# Altium PCB K3000-0176_B.PcbDoc
Units mm, origin at the board's own origin, x right, y up, seen from the top; angles counter-clockwise.
Board outline 168 x 20 mm, 2 copper layers (Top Layer, Bottom Layer), stack 1.671 mm thick; 43 components, 41 nets, 148 pads, 31 vias.
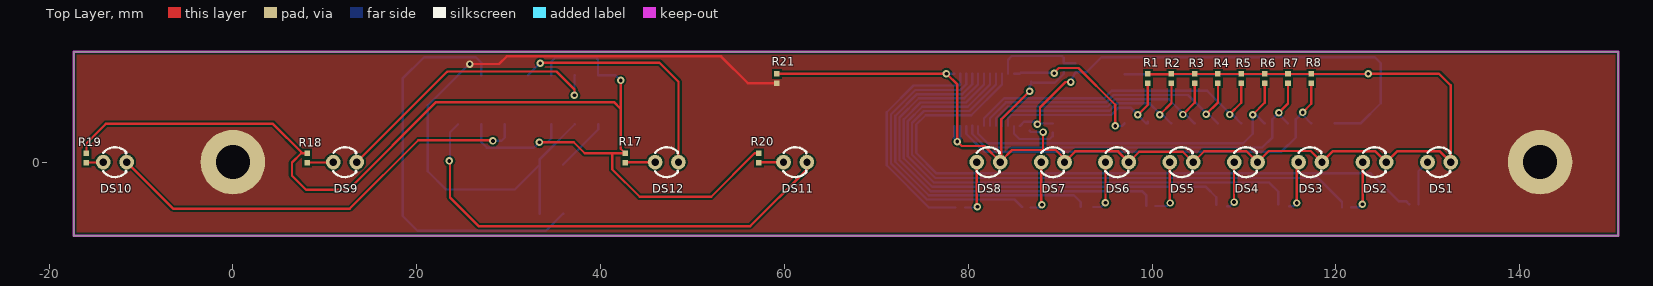
[diagram p0: Top Layer view]
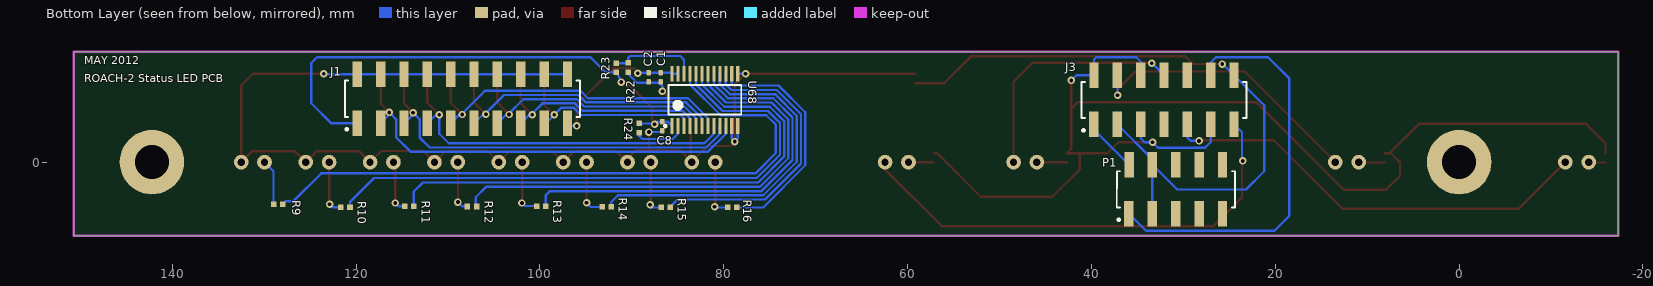
[diagram p1: Bottom Layer view, seen from below]
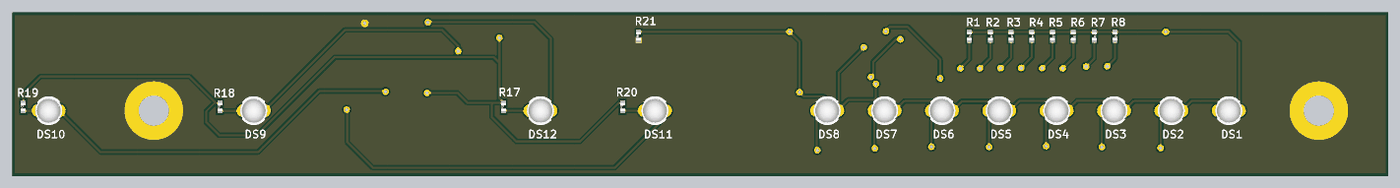
[diagram p2: 3D render of the assembled board from above, using the file's embedded part models]
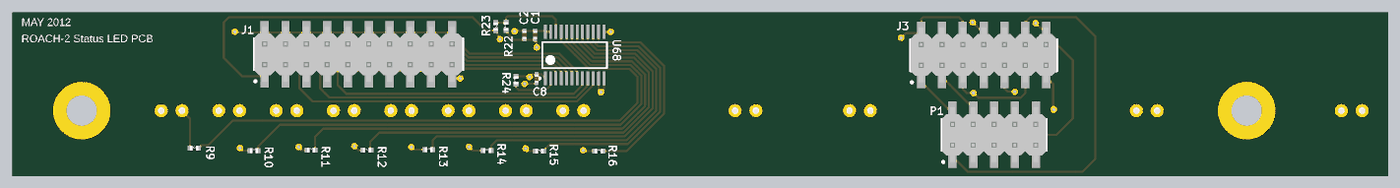
[diagram p3: 3D render of the assembled board from below, using the file's embedded part models]

## Layer stack, top to bottom
Top Layer: signal copper 0.0356
Dielectric: prepreg 1.6002, FR-4, Dk 4.8
Bottom Layer: signal copper 0.0356

## Board outline
-17.3,-8 -17.3,12 150.7,12 150.7,-8

## Design rules (kind name [scope] priority, off if disabled: settings)
Clearance Clearance_Pads [IsPad vs IsPad] p1: gap=0.203
Clearance Clearance_2 [InNamedPolygon('AGND_Z')] p2: gap=0.203
Clearance Clearance_1 [InNamedPolygon('AGND_X')] p3: gap=0.203
Clearance [InNamedPolygon('AGND_Y') Or  InNamedPolygon('AGND_X')] p4: gap=0.203
Clearance Clearance_General [All] p5: gap=0.203
ComponentClearance [All] p1: gap=0.2 collisioncheckmode=3 verticalgap=0.2 showdistances=FALSE
DiffPairsRouting [All] p1 off: maxlimit=0.254 minlimit=0.254 mostfreqgap=0.254 maxuncoupledlength=12.7
FabricationTestPointUsage TestPointUsage [All] p1 off: valid=0 allowmultiple=FALSE
FabricationTestpoint Testpoint [All] p1 off: side=3 testpointundercomponent=TRUE minsize=1.016 maxsize=2.54 preferedsize=1.524 minholesize=0 maxholesize=1.016 preferedholesize=0.813 testpointgrid=0.025 allowsidetop=TRUE allowsidebottom=TRUE usegrid=TRUE gridtolerance=0
FanoutControl Fanout_BGA [IsBGA] p1 off: bgadir=Out bgaviamode=Centered fanoutstyle=Auto fanoutdirection=Alternating viagrid=0.025 // Fanout_BGA (Default Rule)
FanoutControl Fanout_LCC [IsLCC] p2 off: bgadir=Out bgaviamode=Centered fanoutstyle=Auto fanoutdirection=Alternating viagrid=0.025 // Fanout_LCC (Default Rule)
FanoutControl Fanout_SOIC [IsSOIC] p3 off: bgadir=Out bgaviamode=Centered fanoutstyle=Auto fanoutdirection=Alternating viagrid=0.025 // Fanout_SOIC (Default Rule)
FanoutControl Fanout_Small [(CompPinCount < 5)] p4 off: bgadir=Out bgaviamode=Centered fanoutstyle=Auto fanoutdirection=OutThenIn viagrid=0.025 // Fanout_Small (Default Rule)
FanoutControl Fanout_Default [All] p5 off: bgadir=Out bgaviamode=Centered fanoutstyle=Auto fanoutdirection=Alternating viagrid=0.025 // Fanout_Default (Default Rule)
HoleSize [All] p1 off: absolutevalues=TRUE maxlimit=2.54 minlimit=0.406 maxpercent=80.000 minpercent=20.000
LayerPairs [All] p1 off: enforce=TRUE
MinimumAnnularRing [All] p1: minimumring=0.203
PlaneClearance [All] p1 off: clearance=0.3
PlaneConnect PlaneConnect_Pads [Ispad] p1 off: planeconnectstyle=Relief reliefexpansion=0.5 reliefentries=4 reliefconductorwidth=0.35 reliefairgap=0.25
PlaneConnect PlaneConnect_Vias [Isvia] p2 off: planeconnectstyle=Direct reliefexpansion=0.508 reliefentries=4 reliefconductorwidth=0.254 reliefairgap=0.254
PolygonConnect "Pwr via" [All] p1: connectstyle=Direct reliefconductorwidth=0.254 reliefentries=4 polygonreliefangle="90 Angle"
PolygonConnect [All] p2: connectstyle=Relief reliefconductorwidth=0.5 reliefentries=4 polygonreliefangle="90 Angle"
RoutingCorners [All] p1: cornerstyle=45-Degree minsetback=2.5 maxsetback=2.5
RoutingPriority [All] p1 off: routingpriority=0
RoutingTopology [All] p1 off: topology=Shortest
RoutingVias "Pwr Vias" [Isvia] p1: holewidth=0.406 width=0.813 viastyle="Through Hole" minholewidth=0.406 minwidth=0.813 maxholewidth=0.406 maxwidth=2.54
RoutingVias RoutingVias_General [All] p2: holewidth=0.406 width=0.813 viastyle="Through Hole" minholewidth=0.406 minwidth=0.813 maxholewidth=0.406 maxwidth=0.813
SilkscreenOverComponentPads [All] p1: minsilkscreentomaskgap=0.254
SolderMaskExpansion [All] p1: expansion=0.06
ViasUnderSMD [All] p1: allowed=FALSE
Width Width_Power [InNetClass('POWER')] p1: maxlimit=0.508 minlimit=0.508 preferedwidth=0.508 minimp=50.000000 maximp=50.000000 favimp=50.000000
Width Width_General [InNetClass('signal')] p2: maxlimit=0.254 minlimit=0.254 preferedwidth=0.254 minimp=50.000000 maximp=50.000000 favimp=50.000000
11 further rules are at their usual default settings.

## Components (designator, comment, footprint, x,y, rotation, side; value= is the part's Value field where it differs from the comment)
C1 "0.1uF" CAPC1005X60L 86.868,9.238 r90 bottom
C2 "0.1uF" CAPC1005X60L 88.163,9.238 r90 bottom
C8 "0.1uF" CAPC1005X60L 86.69,3.912 r90 bottom
DS1 "LS-3341" LED-3MM 131.225,0 r90 top locked
DS2 "LS-3341" LED-3MM 124.2,0 r90 top locked
DS3 "LS-3341" LED-3MM 117.2,0 r90 top locked
DS4 "LS-3341" LED-3MM 110.2,0 r90 top locked
DS5 "LS-3341" LED-3MM 103.2,0 r90 top locked
DS6 "LS-3341" LED-3MM 96.2,0 r90 top locked
DS7 "LS-3341" LED-3MM 89.2,0 r90 top locked
DS8 "LS-3341" LED-3MM 82.2,0 r90 top locked
DS9 "LS-3341" LED-3MM 12.2,0 r90 top locked
DS10 "LS-3341" LED-3MM -12.825,0 r90 top locked
DS11 "LS-3341" LED-3MM 61.175,0 r90 top locked
DS12 "LS-3341" LED-3MM 47.2,0 r90 top locked
J1 "1-1241050-0" "HEADER 10x2, SMT" 108.433,6.883 r180 bottom
J3 "1241050-7" "HEADER 7x2, SMT" 32.106,6.782 r180 bottom
P1 "SMT Header 5X2" "HEADER 5x2, SMT" 30.81,-2.972 r180 bottom
R1 "10K" RESC1005X40L 99.543,9.093 r270 top
R2 "10K" RESC1005X40L 102.108,9.093 r270 top
R3 "10K" RESC1005X40L 104.623,9.093 r270 top
R4 "10K" RESC1005X40L 107.163,9.093 r270 top
R5 "10K" RESC1005X40L 109.703,9.093 r270 top
R6 "10K" RESC1005X40L 112.243,9.093 r270 top
R7 "10K" RESC1005X40L 114.783,9.093 r270 top
R8 "10K" RESC1005X40L 117.323,9.093 r270 top
R9 "180R" RESC1005X40L 128.473,-4.597 r180 bottom
R10 "180R" RESC1005X40L 121.158,-4.902 r180 bottom
R11 "180R" RESC1005X40L 114.198,-4.801 r180 bottom
R12 "180R" RESC1005X40L 107.391,-4.826 r180 bottom
R13 "180R" RESC1005X40L 99.847,-4.775 r180 bottom
R14 "180R" RESC1005X40L 92.735,-4.877 r180 bottom
R15 "180R" RESC1005X40L 86.309,-4.928 r180 bottom
R16 "180R" RESC1005X40L 79.07,-4.928 r180 bottom
R17 "180R" RESC1005X40L 42.697,0.457 r90 top
R18 "180R" RESC1005X40L 8.077,0.457 r90 top
R19 "180R" RESC1005X40L -15.926,0.457 r90 top
R20 "180R" RESC1005X40L 57.226,0.457 r90 top
R21 "0R" RESC1005X40L 59.182,9.093 r90 top
R22 "0R" RESC1005X40L 90.399,10.287 r90 bottom
R23 "3K3" RESC1005X40L 91.669,10.262 r270 bottom
R24 "3K3" RESC1005X40L 89.179,3.708 r90 bottom
U68 "SN74AVC8T245" PW024 82.042,6.782 r90 bottom

## Footprints (in the part's own frame and the unit in brackets; to place one, negate y for a bottom-side part, rotate by r counter-clockwise, add the part's x,y. Pads: shape width x height; smd on the part's side, far side on the other; paste and mask are expansions set on the pad)
CAPC1005X60L [mm] "Chip Capacitor, Body 1.0x0.5mm, IPC High Density"
  rrect50% 0.6x0.5 smd: 1(-0.5,0) 2(0.5,0)
  body extent -0.5,-0.25 0.5,0.25, height 0.49
"HEADER 5x2, SMT" [mm] "SMT Header, 5 x 2 rows, 2.54mm pitch"
  rect 1.02x2.77 smd: 1(-5.114,-2.642) 2(-5.097,2.692) 3(-2.557,-2.642) 4(-2.557,2.692) 5(-0.017,-2.642) 6(-0.017,2.692) 7(2.523,-2.642) 8(2.523,2.692) 9(5.063,-2.642) 10(5.063,2.692)
  silkscreen extent -6.43,-3.43 6.43,1.98, body extent -6.38,-3.58 6.32,3.62, height 9.94
"HEADER 7x2, SMT" [mm] "SMT Header, 7 x 2 rows, 2.54mm pitch"
  rect 1.02x2.77 smd: 1(-7.638,-2.664) 2(-7.621,2.67) 3(-5.081,-2.664) 4(-5.081,2.67) 5(-2.541,-2.664) 6(-2.541,2.67) 7(-0.001,-2.664) 8(-0.001,2.67) 9(2.539,-2.664) 10(2.539,2.67) 11(5.079,-2.664) 12(5.079,2.67) 13(7.619,-2.664) 14(7.619,2.67)
  silkscreen extent -8.97,-3.45 8.99,1.96, body extent -8.89,-3.58 8.89,3.62, height 9.94
"HEADER 10x2, SMT" [mm] "SMT Header, 10 x 2 rows, 2.54mm pitch"
  rect 1.02x2.77 smd: 1(-11.43,-2.667) 2(-11.447,2.667) 3(-8.89,-2.667) 4(-8.89,2.667) 5(-6.35,-2.667) 6(-6.35,2.667) 7(-3.81,-2.667) 8(-3.81,2.667) 9(-1.27,-2.667) 10(-1.27,2.667) 11(1.27,-2.667) 12(1.27,2.667) 13(3.81,-2.667) 14(3.81,2.667) 15(6.35,-2.667) 16(6.35,2.667) 17(8.89,-2.667) 18(8.89,2.667) 19(11.43,-2.667) 20(11.43,2.667)
  silkscreen extent -12.78,-3.43 12.8,1.98, body extent -12.7,-3.61 12.7,3.59, height 9.94
LED-3MM [mil] "Vertical Mount, 3mm LED"
  round 63 hole 31: 1(0,-50)
  round 63 hole 31.5: 2(0,50)
  silkscreen extent -64,-48 64,51, body extent -65,-65 64,65, height 217
PW024 [mm] "Plastic Small Outline Package, 24Pin"
  rect 1.7x0.35 smd: 1(-2.85,3.575) 2(-2.85,2.925) 3(-2.85,2.275) 4(-2.85,1.625) 5(-2.85,0.975) 6(-2.85,0.325) 7(-2.85,-0.325) 8(-2.85,-0.975) 9(-2.85,-1.625) 10(-2.85,-2.275) 11(-2.85,-2.925) 12(-2.85,-3.575) 13(2.85,-3.575) 14(2.85,-2.925) 15(2.85,-2.275) 16(2.85,-1.625) 17(2.85,-0.975) 18(2.85,-0.325) 19(2.85,0.325) 20(2.85,0.975) 21(2.85,1.625) 22(2.85,2.275) 23(2.85,2.925) 24(2.85,3.575)
  silkscreen extent -2.97,-3.95 1.6,4.43, body extent -2.25,-3.95 2.25,3.95, height 1.2
RESC1005X40L [mm] "Chip Resistor, Body 1.1x0.5mm, IPC High Density"
  rect 0.6x0.6 smd: 1(-0.5,0) 2(0.5,0)
  body extent -0.5,-0.3 0.5,0.3, height 0.2

## Part data
C1 C2 C8: library part CAP-CER-1, "0.1uF, Ceramic Capacitor"
DS1 DS2 DS3 DS4 DS10 DS11: library part OPTO-LED-2, "Green, 3mm, LED"
DS5 DS6 DS7 DS8 DS9 DS12: library part OPTO-LED-3, "Red, 3mm, LED"
J1: library part CONN-PCB-22, "2x10, 2.54 mm Pitch, Male Header, Surface Mount"
J3: library part CONN-PCB-21, "2x7, 2.54 mm Pitch, Male Header, Surface Mount"
P1: library part CONN-PCB-20, "2x5, 2.54 mm Pitch, Male Header, Surface Mount"
R1 R2 R3 R4 R5 R6 R7 R8: library part RES-TF-5, "10K, 1.1mm x 0.5mm, Thick Film Resistor"
R9 R10 R11 R12 R13 R14 R15 R16 R17 R18 R19 R20: library part RES-TF-9, "180R, 1.1mm x 0.5mm, Thick Film Resistor"
R21 R22: library part RES-TF-0, "0R, 1.1mm x 0.5mm, Thick Film Resistor"
R23 R24: library part RES-TF-7, "3K3, 1.1mm x 0.5mm, Thick Film Resistor"
U68: library part IC-LOG-10, "8-BIT DUAL-SUPPLY BUS TRANSCEIVER  WITH CONFIGURABLE VOLTAGE TRANSLATION AND 3-STATE OUTPUTS"

## Free pads (board coordinates)
  round 7.01 hole 3.708: 0(142.2,0) 1(0,0)

## Via types
v1: diameter 0.813, hole 0.406, Top Layer to Bottom Layer, 31 vias

## Nets (pads, with @x,y where several pads share a name; then routed paths per layer and width w, separated by ;. In a path a pad name is that pad's centre, name@x,y a point inside that pad or via, vN(x,y) a via of type N, cw(c..) or ccw(c..) an arc to the next point about the centre after c; other vN are vias at no path point)
1V5: C8.2 J1.1 R23.2 R24.2 U68.1 | length 56
  Top Layer w0.254: v1(87.528,4.115) 87.808,4.394 87.808,5.944 90.576,8.712 v1(91.135,8.712)
  Bottom Layer w0.254: U68.1 86.097,4.412 C8.2 87.232,4.412 v1(87.528,4.115) ; v1@87.528,4.208 R24.2 ; v1(91.135,8.712) v1@91.135,8.738 ; v1@91.135,8.865 v1@91.135,8.738 ; J1.1 122.682,4.216 124.866,6.401 124.866,10.77 124.231,11.405 94.488,11.405 92.845,9.762 R23.2 v1@91.135,8.738
3V3AUX: J3.2 J3.5 J3.6 J3.11 R17.2 R18.2 R19.2 R20.2 | length 133.2
  Top Layer w0.254: R19.2 -15.926,2.057 -13.818,4.166 4.361,4.166 7.569,0.957 R18.2 ; R18.2 7.434,0.957 6.426,-0.051 6.426,-1.473 7.95,-2.997 12.573,-2.997 22.098,6.528 41.453,6.528 42.189,5.791 ; v1(33.35,2.159) 37.084,2.159 38.286,0.957 39.116,0.957 ; 39.032,0.957 39.116,0.957 ; v1(42.189,8.89) 42.189,5.791 ; R20.2@57.048,0.957 56.761,0.957 52.037,-3.767 44.255,-3.767 41.275,-0.787 41.275,0.957 ; 39.116,0.957 41.275,0.957 ; 41.275,0.957 R17.2 42.189,1.465 42.189,5.791
  Bottom Layer w0.254: J3.11 27.026,2.184 27.635,1.575 32.766,1.575 v1(33.35,2.159) 34.214,2.159 34.646,2.591 J3.5 ; J3.6 34.646,10.923 35.128,11.405 39.472,11.405 39.726,11.15 J3.2 41.628,9.451 v1(42.189,8.89)
5VAUX: C1.2 C2.2 J1.19 U68.23 U68.24 | length 16.4
  Top Layer w0.254: v1@89.357,9.754 89.84,10.236 91.999,10.236 95.987,6.248 v1(95.987,3.937)
  Bottom Layer w0.254: U68.23 U68.24 85.723,9.738 C1.2 C2.2 89.297,9.738 v1(89.357,9.677) ; v1(95.987,3.937) 96.723,3.937 J1.19
FAULT_LEDN: DS9.1 J3.4 | length 31.4
  Top Layer w0.254: DS9.1 23.321,9.851 ; 23.325,9.855 35.204,9.855 37.16,7.899 v1(37.16,7.264)
  Bottom Layer w0.254: v1(37.16,7.264) 37.16,9.425 J3.4
GND: J3.3 J3.14 P1.3 P1.4 pad.0 pad.1 R21.1 | length 73.8
  Top Layer w0.254: v1(25.756,10.668) 28.956,10.668 29.794,11.506 53.111,11.506 56.024,8.593 R21.1
  Bottom Layer w0.254: v1@25.603,10.514 25.576,10.541 J3.14 21.209,6.174 21.209,-0.991 23.19,-2.972 30.675,-2.972 P1.4 ; P1.3 P1.4 ; J3.3 33.367,0.298 P1.4
GND_LED: C1.1 C2.1 C8.1 DS1.1 DS2.1 DS3.1 DS4.1 DS5.1 DS6.1 DS7.1 DS8.1 J1.2 J1.4 J1.6 J1.8 J1.10 J1.12 J1.14 J1.16 J1.18 J1.20 R1.1 R2.1 R3.1 R4.1 R5.1 R6.1 R7.1 R8.1 R21.2 R22.1 U68.11 U68.12 U68.13 | length 178.3
  Top Layer w0.254: R21.2 59.215,9.627 v1(77.622,9.627) 78.816,8.433 v1(78.816,2.235) 79.299,1.753 81.754,1.753 83.47,0.037 DS8.1@83.591,0.158 ; v1(86.665,7.722) 83.591,4.648 DS8.1@83.591,0.158 ; v1(88.138,3.277) 88.138,1.321 ; R1.1 99.568,9.568 102.108,9.568 102.133,9.593 R3.1 R4.1 R5.1 R6.1 R7.1 R8.1 123.52,9.593 v1(123.52,9.627) 131.216,9.627 132.495,8.348 DS1.1 131.327,1.168 126.638,1.168 DS2.1 124.302,1.168 119.638,1.168 DS3.1 117.251,1.219 112.689,1.219 DS4.1 110.276,1.194 105.664,1.194 DS5.1 103.34,1.13 98.6,1.13 DS6.1 96.302,1.168 91.638,1.168 DS7.1 90.47,0.36 89.51,1.321 88.138,1.321 ; DS8.1@83.591,0.158 84.754,1.321 88.138,1.321
  Bottom Layer w0.254: v1(77.622,9.627) 77.628,9.632 U68.13 ; U68.12 78.467,2.584 v1(78.816,2.235) 79.117,2.536 U68.11 ; v1(86.665,7.722) 86.665,8.28 86.868,8.484 C1.1 ; C8.1 86.825,3.277 v1(88.138,3.277) ; C1.1@87.097,8.636 89.433,8.636 90.399,9.601 R22.1 ; J1.20 J1.18 J1.16 J1.14 J1.12 J1.10 J1.8 J1.6 J1.4 J1.2 123.444,9.55 v1(123.52,9.627)
NetDS1_2: DS1.2 R9.1 | length 5
  Bottom Layer w0.254: R9.1 128.973,-0.982 DS1.2
NetDS2_2: DS2.2 R10.1 | length 5.9
  Top Layer w0.254: v1@122.93,-4.572 DS2.2
  Bottom Layer w0.254: R10.1 122.555,-4.902 v1(122.885,-4.572)
NetDS3_2: DS3.2 R11.1 | length 5.5
  Top Layer w0.254: v1(115.722,-4.445) 115.722,-0.208 DS3.2
  Bottom Layer w0.254: R11.1@114.927,-4.801 115.367,-4.801 v1(115.722,-4.445)
NetDS4_2: DS4.2 R12.1 | length 5.3
  Top Layer w0.254: v1(108.915,-4.343) 108.915,-0.015 DS4.2
  Bottom Layer w0.254: R12.1@108.145,-4.801 108.458,-4.801 v1(108.915,-4.343)
NetDS5_2: DS5.2 R13.1 | length 6.2
  Top Layer w0.254: v1@101.93,-4.445 DS5.2
  Bottom Layer w0.254: R13.1 101.625,-4.775 v1(101.956,-4.445)
NetDS6_2: DS6.2 R14.1 | length 6
  Top Layer w0.254: v1@94.93,-4.42 DS6.2
  Bottom Layer w0.254: 93.574,-4.877 94.463,-4.877 v1(94.92,-4.42)
NetDS7_2: DS7.2 R15.1 | length 5.8
  Top Layer w0.254: DS7.2 87.93,-4.542 v1(88.011,-4.623)
  Bottom Layer w0.254: R15.1 v1@87.935,-4.928
NetDS8_2: DS8.2 R16.1 | length 6.4
  Top Layer w0.254: v1@80.924,-4.928 v1(81.001,-4.851) 80.93,-4.781 DS8.2
  Bottom Layer w0.254: R16.1@79.654,-4.928 80.924,-4.928 v1(81.001,-4.851)
NetDS9_2: DS9.2 R18.1 | length 2.9
  Top Layer w0.254: R18.1 10.887,-0.043 DS9.2
NetDS10_2: DS10.2 R19.1 | length 1.8
  Top Layer w0.254: R19.1 -14.138,-0.043 DS10.2
NetDS11_2: DS11.2 R20.1 | length 2.7
  Top Layer w0.254: R20.1 57.269,0 DS11.2
NetDS12_2: DS12.2 R17.1 | length 3.2
  Top Layer w0.254: R17.1@42.697,0 DS12.2
NetR9_2: R9.2 U68.21 | length 71.4
  Bottom Layer w0.254: U68.21 83.667,8.458 80.321,5.112 78.805,5.112 78.792,5.099 78.779,5.112 75.374,5.112 74.346,4.083 74.346,0.991 76.556,-1.219 123.774,-1.219 126.797,-4.242 127.618,-4.242 R9.2
NetR10_2: R10.2 U68.20 | length 65
  Bottom Layer w0.254: U68.20 83.017,8.458 80.128,5.569 75.185,5.569 73.889,4.273 73.889,0.801 76.417,-1.727 118.059,-1.727 120.658,-4.326 R10.2
NetR11_2: R11.2 U68.19 | length 58.9
  Bottom Layer w0.254: U68.19 82.367,8.458 79.935,6.026 74.996,6.026 73.431,4.462 73.431,0.612 76.253,-2.21 112.725,-2.21 113.716,-3.2 R11.2@113.716,-4.589
NetR12_2: R12.2 U68.18 | length 52.3
  Bottom Layer w0.254: U68.18 81.717,8.458 79.742,6.484 74.806,6.484 72.974,4.652 72.974,0.422 76.089,-2.692 105.867,-2.692 106.985,-3.81 R12.2@106.985,-4.64
NetR13_2: R13.2 U68.17 | length 45.4
  Bottom Layer w0.254: U68.17 81.067,8.458 79.55,6.941 74.617,6.941 72.517,4.841 72.517,0.233 75.9,-3.15 98.908,-3.15 99.347,-3.589 R13.2
NetR14_2: R14.2 U68.16 | length 38.5
  Bottom Layer w0.254: U68.16 80.417,8.458 79.357,7.398 74.428,7.398 72.06,5.03 72.06,0.044 75.71,-3.607 91.491,-3.607 92.235,-4.351 R14.2
NetR15_2: R15.2 U68.15 | length 32.3
  Bottom Layer w0.254: U68.15 79.767,8.462 79.161,7.855 74.238,7.855 71.603,5.22 71.603,-0.146 75.521,-4.064 85.039,-4.064 R15.2@85.856,-4.881
NetR16_2: R16.2 U68.14 | length 25.5
  Bottom Layer w0.254: R16.2 75.711,-4.928 71.127,-0.343 71.127,5.417 74.041,8.331 78.99,8.331 79.117,8.458 U68.14
NetR22_2: R22.2 R23.1 U68.22 | length 9.7
  Bottom Layer w0.254: U68.22 84.317,11.125 84.734,11.543 90.21,11.543 90.399,11.354 R22.2 90.424,10.762 R23.1
NetR24_1: R24.1 U68.2 | length 5.8
  Bottom Layer w0.254: U68.2 84.967,3.09 85.542,2.515 88.875,2.515 89.179,2.819 R24.1
POWER_LEDN: DS10.1 J3.9 | length 48.7
  Top Layer w0.254: DS10.1 -6.5,-5.055 12.725,-5.055 20.168,2.388 28.431,2.388 28.296,2.523 v1(28.296,2.311)
  Bottom Layer w0.254: v1(28.296,2.311) 28.296,2.523 28.482,2.337 29.21,2.337 29.566,2.693 J3.9
POWER_PBN: J3.1 P1.2 | length 6
  Bottom Layer w0.254: P1.2 39.743,3.557 J3.1
RESET_PBN: J3.12 P1.1 | length 45
  Bottom Layer w0.254: J3.12 27.026,10.826 26.448,11.405 20.787,11.405 18.466,9.084 18.466,-5.842 20.091,-7.468 34.07,-7.468 P1.1
SW_ERR: DS12.1 J3.8 | length 26.4
  Top Layer w0.254: v1@33.579,10.82 46.406,10.82 48.47,8.756 DS12.1
  Bottom Layer w0.254: J3.8 33.425,10.77 v1(33.452,10.77)
SW_RDY: DS11.1 J3.13 | length 51.9
  Top Layer w0.254: v1(23.546,0.127) 23.622,0.051 23.622,-3.861 26.721,-6.96 56.286,-6.96 62.445,-0.801 DS11.1
  Bottom Layer w0.254: v1(23.546,0.127) 23.622,0.203 23.622,3.253 J3.13
V6_GPIO0: J1.17 R1.2 U68.3 | length 21.4
  Top Layer w0.254: v1(98.45,5.156) 99.543,6.248 R1.2
  Bottom Layer w0.254: U68.3 84.317,4.774 84.674,5.131 95.555,5.131 96.356,5.932 97.649,5.932 99.365,4.216 99.543,4.394 J1.17
V6_GPIO1: J1.15 R2.2 U68.4 | length 24.6
  Top Layer w0.254: v1(100.838,5.156) 102.108,6.426 R2.2
  Bottom Layer w0.254: U68.4 83.667,4.774 84.481,5.588 95.366,5.588 96.166,6.389 99.732,6.389 100.838,5.283 v1(100.838,5.156) ; v1@101.143,5.156 J1.15
V6_GPIO2: J1.13 R3.2 U68.5 | length 28.5
  Top Layer w0.254: v1(103.353,5.182) 104.623,6.452 R3.2 ; R3.2@104.546,8.669 R3.2@104.623,8.746
  Bottom Layer w0.254: U68.5 83.017,4.774 84.288,6.045 95.176,6.045 95.977,6.846 101.815,6.846 v1@103.416,5.245 ; v1(103.353,5.182) 103.657,5.182 J1.13
V6_GPIO3: J1.11 R4.2 U68.6 | length 32.1
  Top Layer w0.254: v1(105.867,5.207) 107.163,6.502 R4.2 ; R4.2@107.086,8.669 R4.2@107.163,8.746
  Bottom Layer w0.254: U68.6 82.367,4.774 84.096,6.502 94.987,6.502 95.788,7.303 103.898,7.303 105.867,5.334 v1(105.867,5.207) 106.172,5.207 J1.11
V6_GPIO4: J1.9 R5.2 U68.7 | length 35.7
  Top Layer w0.254: v1(108.433,5.182) 109.703,6.452 R5.2 ; R5.2@109.626,8.669 R5.2@109.703,8.746
  Bottom Layer w0.254: U68.7 81.717,4.774 83.903,6.96 94.798,6.96 95.598,7.76 105.981,7.76 108.433,5.308 v1(108.433,5.182) 108.737,5.182 J1.9
V6_GPIO5: J1.7 R6.2 U68.8 | length 39.4
  Top Layer w0.254: v1(110.947,5.156) 112.243,6.452 R6.2 ; R6.2@112.166,8.669 R6.2@112.243,8.746
  Bottom Layer w0.254: U68.8 81.067,3.09 82.099,2.057 109.906,2.057 110.947,3.099 v1(110.947,5.156) 111.303,5.156 J1.7
V6_GPIO6: J1.5 R7.2 U68.9 | length 42.1
  Top Layer w0.254: v1(113.792,5.385) 114.783,6.375 R7.2 ; R7.2@114.706,8.669 R7.2@114.783,8.746
  Bottom Layer w0.254: U68.9@80.416,3.944 80.416,3.09 81.907,1.6 111.988,1.6 113.083,2.695 113.083,4.676 113.487,5.08 ; v1@113.919,5.08 J1.5
V6_GPIO7: J1.3 R8.2 U68.10 | length 45.5
  Top Layer w0.254: v1(116.383,5.41) 117.323,6.35 R8.2@117.323,8.542
  Bottom Layer w0.254: U68.10 79.767,3.09 81.714,1.143 114.071,1.143 115.623,2.695 115.623,4.65 116.078,5.105 ; v1@116.434,5.105 J1.3
pads on no net: J3.7 J3.10 P1.5 P1.6 P1.7 P1.8 P1.9 P1.10

## Polygon pours and split planes (outlines as drawn)
GND on Top Layer "GND" (solid, pour order 4): -17.018,11.684 -17.018,-7.62 150.368,-7.62 150.368,11.684 -17.018,11.684

## Keep-outs
Keep-Out Layer:
  the board outline again, w0.254

## Silkscreen, mask and mechanical layers (free items; w line width, h text height)
Bottom Overlay:
  text "MAY 2012" at 149.55,10.35 h1.5
  text "ROACH-2 Status LED PCB" at 149.55,8.35 h1.5
PCB Outline:
  circle w0.254: c142.2,0 r1.628
  lines w0.254: -17.3,-8 150.7,-8 150.7,12 -17.3,12 -17.3,-8
Mechanical Data 1:
  lines w0.1: -17.3,-8 -17.3,-8 ; -17.3,-8 150.7,-8 150.7,12 -17.3,12 -17.3,-8
Drill Drawing:
  text ".Legend" at -16.4,13.8 h1.52